# Altium PCB AICat V1.4 双面板 板厚1.6mm.PcbDoc (part 3 of 4)
Units mm, origin at the board's own origin, x right, y up, seen from the top; angles counter-clockwise.
Board outline 152.4 x 101.6 mm, 2 copper layers (Top Layer, Bottom Layer); 106 components, 84 nets, 315 pads, 240 vias.
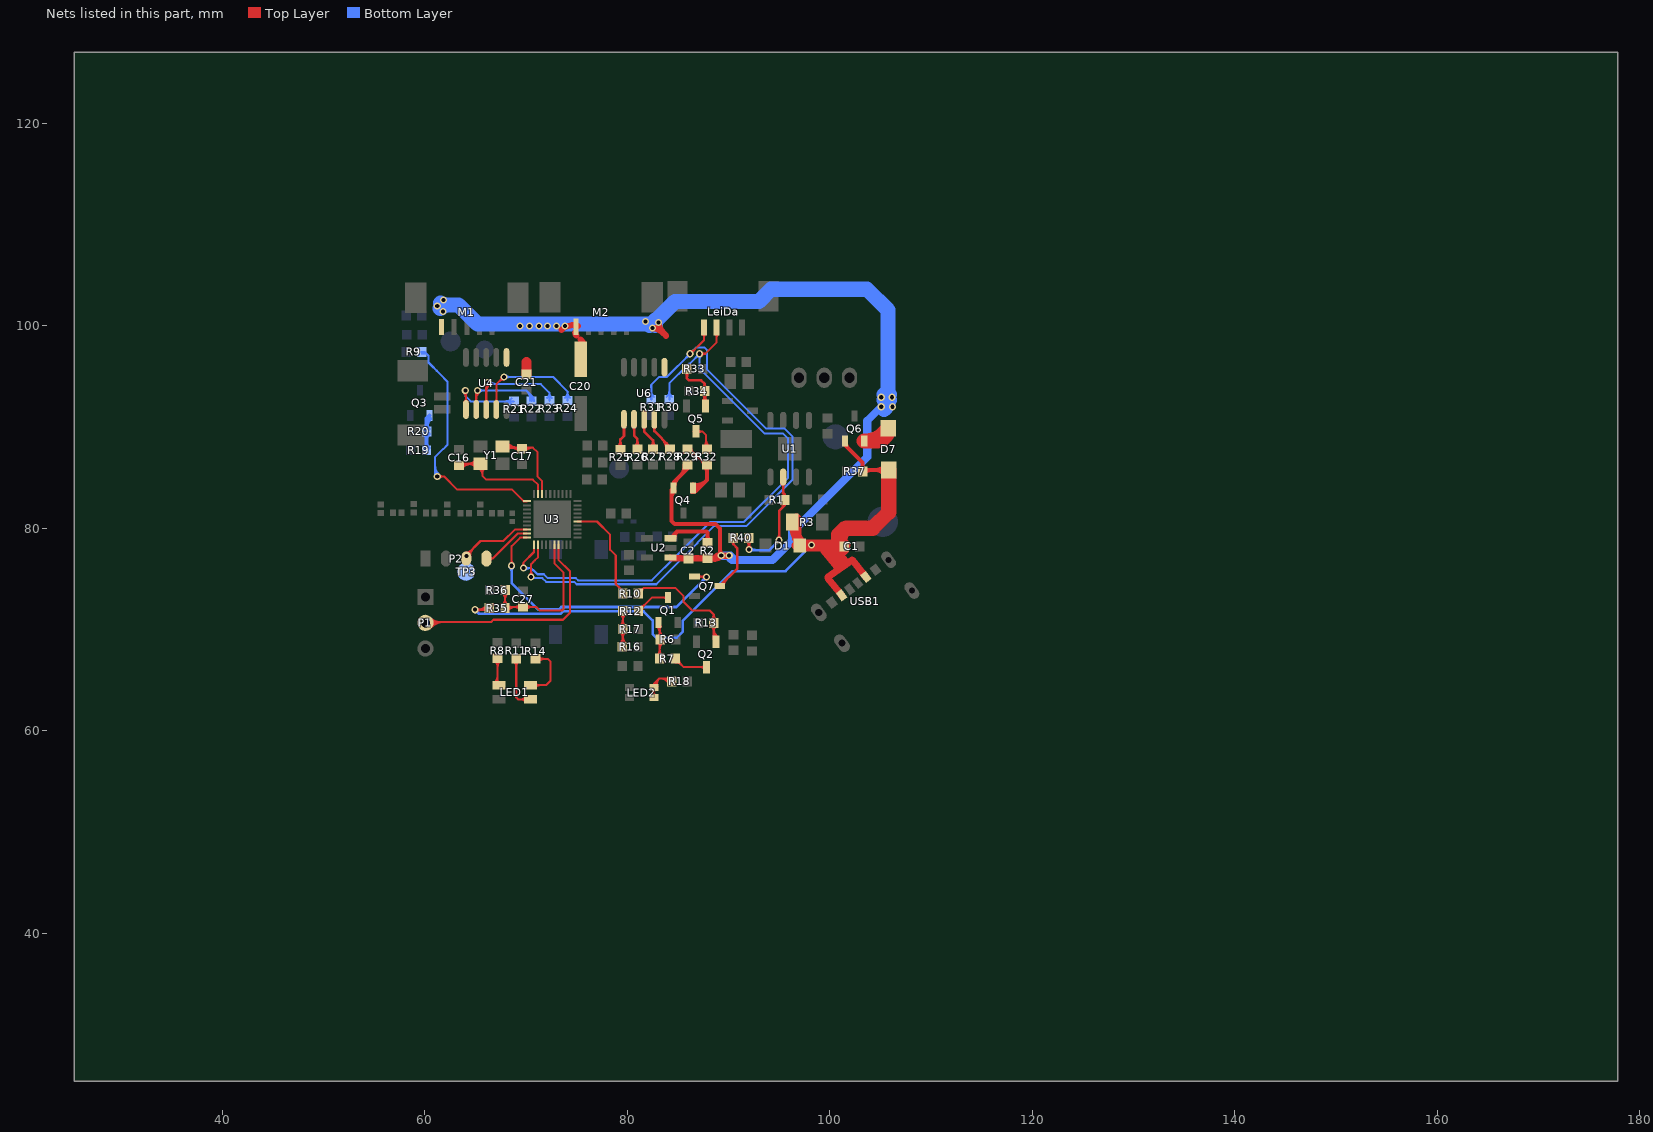
[diagram p3: the nets of this part, all layers, seen from the top]

## Via types
v1: diameter 0.7, hole 0.4, Top Layer to Bottom Layer, tented both sides, 240 vias

## Nets (pads, with @x,y where several pads share a name; then routed paths per layer and width w, separated by ;. In a path a pad name is that pad's centre, name@x,y a point inside that pad or via, vN(x,y) a via of type N, cw(c..) or ccw(c..) an arc to the next point about the centre after c; other vN are vias at no path point) (continued)
NetLED1_2: LED1.2 R8.1 | length 11.9
  Top Layer w0.203: R8.1@67.208,67.15 67.208,64.631 LED1.2@67.335,64.505 ; LED1.2@66.877,64.723 ccw(c66.075,65.524) 67.208,65.524 ; LED1.2@66.877,64.723 ccw(c66.075,65.524) 67.208,65.524 ; LED1.2@66.877,64.723 ccw(c66.075,65.524) 67.208,65.524 ; R8.1@66.951,66.893 cw(c66.331,66.272) 67.208,66.272 ; R8.1@66.951,66.893 cw(c66.331,66.272) 67.208,66.272 ; R8.1@66.951,66.893 cw(c66.331,66.272) 67.208,66.272 ; LED1.2@67.02,64.579 ccw(c66.566,65.033) 67.208,65.033 ; LED1.2@67.02,64.579 ccw(c66.566,65.033) 67.208,65.033 ; LED1.2@67.02,64.579 ccw(c66.566,65.033) 67.208,65.033 ; 67.208,64.975 ccw(c67.565,64.975) LED1.2@67.313,64.723 ; 67.208,64.975 ccw(c67.565,64.975) LED1.2@67.313,64.723 ; 67.208,64.975 ccw(c67.565,64.975) LED1.2@67.313,64.723 ; 67.208,66.272 cw(c68.086,66.272) R8.1@67.465,66.893 ; 67.208,66.272 cw(c68.086,66.272) R8.1@67.465,66.893 ; 67.208,66.272 cw(c68.086,66.272) R8.1@67.465,66.893
NetLED1_3: LED1.3 R11.1 | length 13
  Top Layer w0.203: R11.1@69.037,67.124 69.037,63.297 69.24,63.094 70.424,63.094 LED1.3@70.435,63.105 ; R11.1@68.78,66.867 cw(c68.16,66.247) 69.037,66.247 ; R11.1@68.78,66.867 cw(c68.16,66.247) 69.037,66.247 ; R11.1@68.78,66.867 cw(c68.16,66.247) 69.037,66.247 ; 69.037,66.247 cw(c69.915,66.247) R11.1@69.294,66.867 ; 69.037,66.247 cw(c69.915,66.247) R11.1@69.294,66.867 ; 69.037,66.247 cw(c69.915,66.247) R11.1@69.294,66.867 ; 69.423,63.094 ccw(c69.423,63.876) LED1.3@69.977,63.323 ; 69.423,63.094 ccw(c69.423,63.876) LED1.3@69.977,63.323 ; 69.423,63.094 ccw(c69.423,63.876) LED1.3@69.977,63.323 ; 69.477,63.094 cw(c69.477,62.387) LED1.3@69.977,62.887 ; 69.477,63.094 cw(c69.477,62.387) LED1.3@69.977,62.887 ; 69.477,63.094 cw(c69.477,62.387) LED1.3@69.977,62.887
NetLED1_4: LED1.4 R14.1 | length 13.3
  Top Layer w0.203: LED1.4@70.435,64.505 71.972,64.505 72.441,64.973 72.441,66.827 72.161,67.107 70.95,67.107 R14.1@70.942,67.099 ; LED1.4@70.893,64.287 cw(c71.419,63.76) 71.419,64.505 ; LED1.4@70.893,64.287 cw(c71.419,63.76) 71.419,64.505 ; LED1.4@70.893,64.287 cw(c71.419,63.76) 71.419,64.505 ; LED1.4@70.893,64.723 ccw(c71.419,65.249) 71.419,64.505 ; LED1.4@70.893,64.723 ccw(c71.419,65.249) 71.419,64.505 ; LED1.4@70.893,64.723 ccw(c71.419,65.249) 71.419,64.505 ; R14.1@71.224,66.842 cw(c71.864,66.202) 71.864,67.107 ; R14.1@71.224,66.842 cw(c71.864,66.202) 71.864,67.107 ; R14.1@71.224,66.842 cw(c71.864,66.202) 71.864,67.107 ; R14.1@71.224,67.356 ccw(c71.825,67.957) 71.825,67.107 ; R14.1@71.224,67.356 ccw(c71.825,67.957) 71.825,67.107 ; R14.1@71.224,67.356 ccw(c71.825,67.957) 71.825,67.107
NetLED2_2: LED2.2 LED2.4 R18.2 | length 21.6
  Top Layer w0.203: LED2.4@82.632,63.279 LED2.2@82.632,64.279 82.632,64.649 ; R18.2@84.396,64.872 84.091,65.176 83.16,65.176 ; LED2.4@82.457,63.455 ccw(c82.033,63.879) 82.632,63.879 ; LED2.4@82.457,63.455 ccw(c82.033,63.879) 82.632,63.879 ; LED2.4@82.457,63.455 ccw(c82.033,63.879) 82.632,63.879 ; LED2.2@82.457,64.104 cw(c82.033,63.68) 82.632,63.68 ; LED2.2@82.457,64.104 cw(c82.033,63.68) 82.632,63.68 ; LED2.2@82.457,64.104 cw(c82.033,63.68) 82.632,63.68 ; LED2.2@82.538,64.509 ccw(c82.481,64.649) 82.632,64.649 ; LED2.2@82.538,64.509 ccw(c82.481,64.649) 82.632,64.649 ; LED2.2@82.538,64.509 ccw(c82.481,64.649) 82.632,64.649 ; LED2.2@82.583,64.229 cw(c83.03,64.379) 82.696,64.713 ; LED2.2@82.583,64.229 cw(c83.03,64.379) 82.696,64.713 ; LED2.2@82.583,64.229 cw(c83.03,64.379) 82.696,64.713 ; 82.632,63.68 cw(c83.232,63.68) LED2.2@82.808,64.104 ; 82.632,63.68 cw(c83.232,63.68) LED2.2@82.808,64.104 ; 82.632,63.68 cw(c83.232,63.68) LED2.2@82.808,64.104 ; 82.632,63.879 ccw(c83.232,63.879) LED2.4@82.808,63.455 ; 82.632,63.879 ccw(c83.232,63.879) LED2.4@82.808,63.455 ; 82.632,63.879 ccw(c83.232,63.879) LED2.4@82.808,63.455 ; 82.632,64.649 ccw(c82.783,64.649) LED2.2@82.726,64.509 ; 82.632,64.649 ccw(c82.783,64.649) LED2.2@82.726,64.509 ; 82.632,64.649 ccw(c82.783,64.649) LED2.2@82.726,64.509 ; 82.632,64.649 83.16,65.176 ; LED2.2@82.775,64.294 cw(c83.376,64.496) 82.928,64.945 ; LED2.2@82.775,64.294 cw(c83.376,64.496) 82.928,64.945 ; LED2.2@82.775,64.294 cw(c83.376,64.496) 82.928,64.945 ; LED2.2@82.968,64.359 cw(c83.723,64.613) 83.16,65.176 ; LED2.2@82.968,64.359 cw(c83.723,64.613) 83.16,65.176 ; LED2.2@82.968,64.359 cw(c83.723,64.613) 83.16,65.176 ; 83.16,65.176 cw(c83.16,64.03) 84.099,64.688 ccw(c83.16,64.03) 83.16,65.176 ; 83.55,65.176 cw(c83.55,64.304) 84.265,64.805 ccw(c83.55,64.304) 83.55,65.176 ; R18.2@83.941,65.176 cw(c83.941,64.577) 84.431,64.921 ccw(c83.941,64.577) R18.2@83.941,65.176
NetQ1_1: Q1.1 R6.2 R7.1 | length 20.8
  Top Layer w0.203: Q1.1@83.047,70.305 cw(c82.671,69.929) 83.202,69.929 ; Q1.1@83.187,70.68 83.202,70.665 83.202,69.088 R6.2@83.253,69.037 83.202,68.986 R7.1@83.202,67.132 ; 83.202,70.004 cw(c83.629,70.004) Q1.1@83.327,70.305 ; R7.1@82.945,67.414 ccw(c82.325,68.035) 83.202,68.035 ; R7.1@82.945,67.414 ccw(c82.325,68.035) 83.202,68.035 ; R7.1@82.945,67.414 ccw(c82.325,68.035) 83.202,68.035 ; R6.2@82.996,68.755 cw(c82.498,68.257) 83.202,68.257 ; R6.2@82.996,68.755 cw(c82.498,68.257) 83.202,68.257 ; R6.2@82.996,68.755 cw(c82.498,68.257) 83.202,68.257 ; R6.2@82.996,69.319 ccw(c82.498,69.817) 83.202,69.817 ; R6.2@82.996,69.319 ccw(c82.498,69.817) 83.202,69.817 ; R6.2@82.996,69.319 ccw(c82.498,69.817) 83.202,69.817 ; 83.202,68.012 cw(c84.253,68.012) R6.2@83.51,68.755 ; 83.202,68.012 cw(c84.253,68.012) R6.2@83.51,68.755 ; 83.202,68.012 cw(c84.253,68.012) R6.2@83.51,68.755 ; 83.202,68.035 ccw(c84.08,68.035) R7.1@83.459,67.414 ; 83.202,68.035 ccw(c84.08,68.035) R7.1@83.459,67.414 ; 83.202,68.035 ccw(c84.08,68.035) R7.1@83.459,67.414 ; 83.202,68.503 cw(c83.762,68.503) R6.2@83.366,68.899 ; 83.202,68.503 cw(c83.762,68.503) R6.2@83.366,68.899 ; 83.202,68.503 cw(c83.762,68.503) R6.2@83.366,68.899 ; 83.202,69.571 ccw(c83.762,69.571) R6.2@83.366,69.175 ; 83.202,69.571 ccw(c83.762,69.571) R6.2@83.366,69.175 ; 83.202,69.571 ccw(c83.762,69.571) R6.2@83.366,69.175 ; 83.202,70.062 ccw(c84.253,70.062) R6.2@83.51,69.319 ; 83.202,70.062 ccw(c84.253,70.062) R6.2@83.51,69.319 ; 83.202,70.062 ccw(c84.253,70.062) R6.2@83.51,69.319 ; Q1.1@82.945,70.305 cw(c82.324,69.684) 83.202,69.684 ccw(c82.324,69.684) Q1.1@82.945,70.305
NetQ1_3: Q1.3 R12.1 | length 16.5
  Top Layer w0.203: R12.1@81.11,71.831 81.614,72.335 ; 81.82,72.541 81.614,72.335 ; Q1.3@84.137,73.15 Q1.3@84.035,73.15 82.429,73.15 81.614,72.335 ; R12.1@81.11,72.22 ccw(c81.11,73.157) 81.773,72.494 ; R12.1@81.11,72.22 ccw(c81.11,73.157) 81.773,72.494 ; R12.1@81.11,72.22 ccw(c81.11,73.157) 81.773,72.494 ; R12.1@81.11,72.22 ccw(c81.11,73.157) 81.773,72.494 ; R12.1@81.189,72.211 ccw(c81.288,72.661) 81.614,72.335 ; R12.1@81.189,72.211 ccw(c81.288,72.661) 81.614,72.335 ; R12.1@81.189,72.211 ccw(c81.288,72.661) 81.614,72.335 ; R12.1@81.189,72.211 ccw(c81.288,72.661) 81.614,72.335 ; R12.1@81.189,72.211 ccw(c81.288,72.661) 81.614,72.335 ; R12.1@81.189,72.211 ccw(c81.288,72.661) 81.614,72.335 ; R12.1@81.47,71.906 cw(c81.973,71.976) 81.614,72.335 ; R12.1@81.47,71.906 cw(c81.973,71.976) 81.614,72.335 ; R12.1@81.47,71.906 cw(c81.973,71.976) 81.614,72.335 ; R12.1@81.47,71.906 cw(c81.973,71.976) 81.614,72.335 ; R12.1@81.47,71.906 cw(c81.973,71.976) 81.614,72.335 ; R12.1@81.47,71.906 cw(c81.973,71.976) 81.614,72.335 ; R12.1@81.474,71.856 cw(c82.291,71.856) 81.713,72.434 ; R12.1@81.474,71.856 cw(c82.291,71.856) 81.713,72.434 ; R12.1@81.474,71.856 cw(c82.291,71.856) 81.713,72.434 ; R12.1@81.474,71.856 cw(c82.291,71.856) 81.713,72.434 ; 83.556,73.15 ccw(c83.556,73.629) 83.895,73.291 cw(c83.556,73.629) 83.556,73.15 ; 83.556,73.15 cw(c83.556,72.671) 83.895,73.01 ccw(c83.556,72.671) 83.556,73.15
NetQ2_1: Q2.1 R10.1 R13.2 | length 27.2
  Top Layer w0.203: R10.1@81.085,73.558 81.644,74.117 ; R13.2@88.295,70.945 ccw(c87.737,71.504) 88.527,71.504 88.149,71.882 ; R13.2@88.527,70.663 88.527,69.019 Q2.1@88.758,68.789 ; R13.2@88.552,70.663 88.552,71.478 ; 81.644,74.117 ccw(c82.119,73.642) 81.448,73.604 cw(c82.119,73.642) 81.644,74.117 ; 81.644,74.117 cw(c81.212,74.549) 81.132,73.944 ccw(c81.212,74.549) 81.644,74.117 ; 81.644,74.117 84.734,74.117 85.573,73.279 85.573,72.72 86.411,71.882 87.046,71.882 88.149,71.882 ; 88.149,71.882 88.552,71.478 ; R13.2@88.295,70.381 cw(c87.737,69.822) 88.527,69.822 ; R13.2@88.295,70.381 cw(c87.737,69.822) 88.527,69.822 ; R13.2@88.295,70.381 cw(c87.737,69.822) 88.527,69.822 ; 88.527,69.699 cw(c89.491,69.699) R13.2@88.809,70.381 ; 88.527,69.699 cw(c89.491,69.699) R13.2@88.809,70.381 ; 88.527,69.699 cw(c89.491,69.699) R13.2@88.809,70.381 ; 88.527,69.73 ccw(c89.424,69.73) Q2.1@88.79,69.096 ; 88.527,69.73 ccw(c89.424,69.73) Q2.1@88.79,69.096 ; 88.527,69.73 ccw(c89.424,69.73) Q2.1@88.79,69.096 ; R13.2@88.527,70.221 ccw(c89.915,70.221) Q2.1@88.933,69.239 ; R13.2@88.527,70.221 ccw(c89.915,70.221) Q2.1@88.933,69.239 ; R13.2@88.527,70.221 ccw(c89.915,70.221) Q2.1@88.933,69.239 ; 88.552,71.478 ccw(c89.23,71.478) 88.789,70.964 cw(c89.23,71.478) 88.552,71.478 ; 88.552,71.478 cw(c87.875,71.478) 88.316,70.964 ccw(c87.875,71.478) 88.552,71.478
NetQ2_3: Q2.3 R7.2 | length 9.2
  Top Layer w0.203: R7.2@84.889,67.279 R7.2@84.742,67.132 85.586,66.289 Q2.3@87.808,66.289 ; 87.208,66.289 cw(c87.208,65.689) Q2.3@87.632,66.113 ; 87.208,66.289 ccw(c87.208,66.888) Q2.3@87.632,66.464 ; 87.208,66.289 ccw(c87.208,66.888) Q2.3@87.632,66.464 ; 87.208,66.289 cw(c87.208,65.689) Q2.3@87.632,66.113 ; 87.208,66.289 ccw(c87.208,66.888) Q2.3@87.632,66.464 ; 87.208,66.289 cw(c87.208,65.689) Q2.3@87.632,66.113 ; R7.2@84.742,66.744 cw(c84.742,65.806) 85.405,66.469 ccw(c84.742,65.806) R7.2@84.742,66.744 ; R7.2@85.106,67.107 ccw(c85.923,67.107) 85.345,66.53 cw(c85.923,67.107) R7.2@85.106,67.107
NetQ3_1: Q3.1 R19.1 R20.2 | length 15.9
  Bottom Layer w0.381: R19.1@60.181,87.706 60.181,90.858 Q3.1@60.475,91.153 ; R19.1@59.986,87.925 ccw(c59.518,88.394) 60.181,88.394 ; R19.1@59.986,87.925 ccw(c59.518,88.394) 60.181,88.394 ; R19.1@59.986,87.925 ccw(c59.518,88.394) 60.181,88.394 ; R20.2@60.012,89.341 cw(c59.605,88.934) 60.181,88.934 ; R20.2@60.012,89.341 cw(c59.605,88.934) 60.181,88.934 ; R20.2@60.012,89.341 cw(c59.605,88.934) 60.181,88.934 ; R20.2@60.012,89.779 ccw(c59.605,90.187) 60.181,90.187 ; R20.2@60.012,89.779 ccw(c59.605,90.187) 60.181,90.187 ; R20.2@60.012,89.779 ccw(c59.605,90.187) 60.181,90.187 ; 60.181,88.394 ccw(c60.843,88.394) R19.1@60.375,87.925 ; 60.181,88.394 ccw(c60.843,88.394) R19.1@60.375,87.925 ; 60.181,88.394 ccw(c60.843,88.394) R19.1@60.375,87.925 ; 60.181,88.811 cw(c60.93,88.811) R20.2@60.4,89.341 ; 60.181,88.811 cw(c60.93,88.811) R20.2@60.4,89.341 ; 60.181,88.811 cw(c60.93,88.811) R20.2@60.4,89.341 ; R20.2@60.181,89.942 cw(c61.452,89.942) Q3.1@60.553,90.84 ; R20.2@60.181,89.942 cw(c61.452,89.942) Q3.1@60.553,90.84 ; R20.2@60.181,89.942 cw(c61.452,89.942) Q3.1@60.553,90.84 ; 60.181,90.31 ccw(c60.93,90.31) R20.2@60.4,89.779 ; 60.181,90.31 ccw(c60.93,90.31) R20.2@60.4,89.779 ; 60.181,90.31 ccw(c60.93,90.31) R20.2@60.4,89.779
NetQ4_1: Q4.1 R29.2 R32.1 | length 29.5
  Top Layer w0.203: R29.2@85.801,87.841 86.141,87.841 R32.1@87.706,86.276 ; R29.2@85.979,87.452 cw(c85.979,86.122) 86.919,87.063 ; R29.2@85.979,87.452 cw(c85.979,86.122) 86.919,87.063 ; R29.2@85.979,87.452 cw(c85.979,86.122) 86.919,87.063 ; R29.2@85.979,87.656 cw(c85.979,86.816) 86.572,87.41 ; R29.2@85.979,87.656 cw(c85.979,86.816) 86.572,87.41 ; R29.2@85.979,87.656 cw(c85.979,86.816) 86.572,87.41 ; R29.2@86.342,87.816 ccw(c86.766,87.816) 86.466,87.516 ; R29.2@86.342,87.816 ccw(c86.766,87.816) 86.466,87.516 ; R29.2@86.342,87.816 ccw(c86.766,87.816) 86.466,87.516 ; 86.996,86.986 ccw(c87.834,87.824) R32.1@87.834,86.639 ; 86.996,86.986 ccw(c87.834,87.824) R32.1@87.834,86.639 ; 86.996,86.986 ccw(c87.834,87.824) R32.1@87.834,86.639 ; 87.303,86.679 cw(c86.9,86.276) R32.1@87.47,86.276 ; 87.303,86.679 cw(c86.9,86.276) R32.1@87.47,86.276 ; 87.303,86.679 cw(c86.9,86.276) R32.1@87.47,86.276 ; 87.343,86.639 ccw(c87.834,87.13) R32.1@87.834,86.436 ; 87.343,86.639 ccw(c87.834,87.13) R32.1@87.834,86.436 ; 87.343,86.639 ccw(c87.834,87.13) R32.1@87.834,86.436
  Top Layer w0.381: Q4.1@86.485,83.74 ccw(c86.485,84.634) 87.116,84.002 ; Q4.1@86.485,83.777 86.891,83.777 87.859,84.744 ; Q4.1@86.485,84.121 ccw(c86.485,85.934) 87.767,84.652 ; R32.1@87.859,86.276 87.859,84.744 ; R32.1@87.664,86.082 cw(c87.196,85.613) 87.859,85.613 ; R32.1@87.664,86.082 cw(c87.196,85.613) 87.859,85.613 ; R32.1@87.664,86.082 cw(c87.196,85.613) 87.859,85.613 ; 87.859,84.744 cw(c86.781,85.822) 86.505,84.323 ccw(c86.781,85.822) 87.859,84.744 ; 87.859,85.613 cw(c88.521,85.613) R32.1@88.053,86.082 ; 87.859,85.613 cw(c88.521,85.613) R32.1@88.053,86.082 ; 87.859,85.613 cw(c88.521,85.613) R32.1@88.053,86.082 ; Q4.1@86.367,83.573 ccw(c86.462,84.09) 86.833,83.718 cw(c86.462,84.09) Q4.1@86.367,83.573 ; Q4.1@86.436,83.948 ccw(c86.621,84.956) 87.346,84.231 cw(c86.621,84.956) Q4.1@86.436,83.948 ; Q4.1@86.562,83.668 cw(c86.826,83.404) 86.826,83.777 ccw(c86.826,83.404) Q4.1@86.562,83.668
NetQ5_1: Q5.1 R33.1 R34.2 | length 18.4
  Top Layer w0.203: R33.1@85.768,95.733 R33.1@85.768,95.936 ; Q5.1@87.46,92.667 Q5.1@87.691,92.436
  Top Layer w0.254: R33.1@85.895,95.733 85.895,94.801 86.081,94.615 87.3,94.615 87.638,94.277 ; Q5.1@87.638,92.08 87.638,94.277 ; R33.1@85.656,95.469 cw(c85.079,94.892) 85.895,94.892 ; R33.1@85.656,95.469 cw(c85.079,94.892) 85.895,94.892 ; R33.1@85.656,95.469 cw(c85.079,94.892) 85.895,94.892 ; 85.895,94.892 cw(c86.711,94.892) R33.1@86.134,95.469 ; 85.895,94.892 cw(c86.711,94.892) R33.1@86.134,95.469 ; 85.895,94.892 cw(c86.711,94.892) R33.1@86.134,95.469 ; R34.2@87.399,93.284 cw(c86.822,92.707) 87.638,92.707 ; R34.2@87.399,93.284 cw(c86.822,92.707) 87.638,92.707 ; R34.2@87.399,93.284 cw(c86.822,92.707) 87.638,92.707 ; R34.2@87.427,93.837 ccw(c87.075,94.277) 87.638,94.277 ; R34.2@87.427,93.837 ccw(c87.075,94.277) 87.638,94.277 ; R34.2@87.427,93.837 ccw(c87.075,94.277) 87.638,94.277 ; 87.638,92.707 cw(c88.454,92.707) R34.2@87.877,93.284 ; 87.638,92.707 cw(c88.454,92.707) R34.2@87.877,93.284 ; 87.638,92.707 cw(c88.454,92.707) R34.2@87.877,93.284 ; R34.2@87.638,93.144 ccw(c88.531,93.144) Q5.1@87.899,92.513 ; R34.2@87.638,93.144 ccw(c88.531,93.144) Q5.1@87.899,92.513 ; R34.2@87.638,93.144 ccw(c88.531,93.144) Q5.1@87.899,92.513 ; 87.638,94.277 ccw(c88.201,94.277) R34.2@87.849,93.837 ; 87.638,94.277 ccw(c88.201,94.277) R34.2@87.849,93.837 ; 87.638,94.277 ccw(c88.201,94.277) R34.2@87.849,93.837
NetQ5_3: Q5.3 R32.2 | length 10.2
  Top Layer w0.203: Q5.3@86.563,89.535 87.452,89.535 ; R32.2@87.706,87.816 87.757,87.867 87.757,89.23 87.452,89.535 ; 87.452,89.535 cw(c87.452,90.176) 86.976,89.747 ccw(c87.452,90.176) 87.452,89.535 ; R32.2@87.577,88.073 ccw(c87.141,88.508) 87.757,88.508 ; R32.2@87.577,88.073 ccw(c87.141,88.508) 87.757,88.508 ; R32.2@87.577,88.073 ccw(c87.141,88.508) 87.757,88.508 ; 87.757,88.388 ccw(c88.405,88.388) R32.2@87.947,87.929 ; 87.757,88.388 ccw(c88.405,88.388) R32.2@87.947,87.929 ; 87.757,88.388 ccw(c88.405,88.388) R32.2@87.947,87.929 ; 87.757,88.878 ccw(c88.896,88.878) R32.2@88.091,88.073 ; 87.757,88.878 ccw(c88.896,88.878) R32.2@88.091,88.073 ; 87.757,88.878 ccw(c88.896,88.878) R32.2@88.091,88.073 ; Q5.3@86.967,89.405 cw(c87.282,89.09) 87.282,89.535 ccw(c87.282,89.09) Q5.3@86.967,89.405
NetQ7_3: Q7.3 R40.1 | length 7.8
  Top Layer w0.254: Q7.3@89.127,74.283 90.881,76.037 90.881,78.021 90.467,78.435 ; Q7.3@89.535,74.283 cw(c90.52,74.283) 89.823,74.979 ; R40.1@90.467,79.045 90.467,78.435 ; 90.467,78.435 ccw(c90.13,78.435) 90.298,78.727 cw(c90.13,78.435) 90.467,78.435 ; 90.467,78.435 cw(c90.803,78.435) 90.635,78.727 ccw(c90.803,78.435) 90.467,78.435
NetR1_2: R1.2 R40.2 U1.2 | length 23.6
  Top Layer w0.254: R40.2@91.737,78.773 92.024,78.486 ; R40.2@91.768,78.781 cw(c91.149,78.162) v1@92.024,78.162 ; v1@91.867,78.059 ccw(c91.486,78.44) 92.024,78.44 ccw(c92.563,78.44) v1@92.182,78.059 ; R40.2@91.876,78.708 cw(c91.783,78.486) 92.024,78.486 ; v1(92.024,77.902) 92.024,78.486 ; v1@92.024,78.246 cw(c92.781,78.246) R40.2@92.246,78.781 ; R40.2@92.166,78.721 ccw(c92.291,78.486) 92.024,78.486 ; v1@94.838,78.974 ccw(c94.458,79.355) 94.996,79.355 ccw(c95.534,79.355) v1@95.154,78.974 ; v1(94.996,78.816) 94.996,81.712 95.537,82.253 ; 95.259,81.975 ccw(c94.955,82.279) R1.2@95.281,82.559 ; R1.2@95.397,82.472 cw(c95.298,82.253) 95.537,82.253 ; U1.2@95.402,85.649 U1.2@95.402,85.065 95.402,83.49 95.529,83.363 ; 95.453,82.168 ccw(c95.163,82.458) R1.2@95.474,82.724 ; R1.2@95.537,82.804 95.537,82.253 ; R1.2@95.678,82.472 ccw(c95.777,82.253) 95.537,82.253 ; U1.2@95.277,84.394 cw(c94.973,84.09) 95.402,84.09 ; U1.2@95.277,84.394 cw(c94.973,84.09) 95.402,84.09 ; U1.2@95.277,84.394 cw(c94.973,84.09) 95.402,84.09 ; 95.376,83.516 cw(c94.995,83.135) R1.2@95.464,82.87 ; 95.376,83.516 cw(c94.995,83.135) R1.2@95.464,82.87 ; 95.376,83.516 cw(c94.995,83.135) R1.2@95.464,82.87 ; 95.402,84.09 cw(c95.832,84.09) U1.2@95.528,84.394 ; 95.402,84.09 cw(c95.832,84.09) U1.2@95.528,84.394 ; 95.402,84.09 cw(c95.832,84.09) U1.2@95.528,84.394 ; 95.458,83.435 cw(c95.174,83.151) R1.2@95.474,82.885 ; 95.458,83.435 cw(c95.174,83.151) R1.2@95.474,82.885 ; 95.458,83.435 cw(c95.174,83.151) R1.2@95.474,82.885
  Bottom Layer w0.254: v1@92.182,77.744 cw(c92.44,77.486) 92.44,77.851 ; v1@92.182,78.059 ccw(c92.685,78.563) 92.685,77.851 ; v1@92.329,77.851 94.031,77.851 v1(94.996,78.816) ; v1@94.773,78.816 cw(c94.235,78.816) 94.615,78.436 cw(c94.996,78.055) v1@94.996,78.593
NetR2_2: R2.2 U2.3 | length 10.3
  Top Layer w0.381: U2.3@84.256,79.013 84.923,79.68 ; R2.2@87.935,78.57 87.935,79.578 87.833,79.68 84.923,79.68 ; U2.3@84.666,79.017 cw(c85.548,79.055) 84.923,79.68 ; U2.3@84.666,79.017 cw(c85.548,79.055) 84.923,79.68 ; U2.3@84.666,79.017 cw(c85.548,79.055) 84.923,79.68 ; R2.2@87.741,78.764 ccw(c87.272,79.233) 87.935,79.233 ; R2.2@87.741,78.764 ccw(c87.272,79.233) 87.935,79.233 ; R2.2@87.741,78.764 ccw(c87.272,79.233) 87.935,79.233 ; 87.935,79.233 ccw(c88.598,79.233) R2.2@88.129,78.764 ; 87.935,79.233 ccw(c88.598,79.233) R2.2@88.129,78.764 ; 87.935,79.233 ccw(c88.598,79.233) R2.2@88.129,78.764
NetR12_2: R12.2 R16.2 R17.1 | length 21.4
  Top Layer w0.203: R16.2@79.364,68.583 ccw(c78.866,69.08) 79.57,69.08 ; R12.2@79.57,71.831 79.57,68.351 R16.2@79.621,68.301 ; R16.2@79.734,68.439 cw(c80.13,68.835) 79.57,68.835 ; R16.2@79.878,68.583 cw(c80.621,69.326) 79.57,69.326 ; R17.1@79.288,69.771 cw(c78.606,69.09) 79.57,69.09 ; R17.1@79.288,69.771 cw(c78.606,69.09) 79.57,69.09 ; R17.1@79.288,69.771 cw(c78.606,69.09) 79.57,69.09 ; R17.1@79.288,70.335 ccw(c78.606,71.017) 79.57,71.017 ; R17.1@79.288,70.335 ccw(c78.606,71.017) 79.57,71.017 ; R17.1@79.288,70.335 ccw(c78.606,71.017) 79.57,71.017 ; R12.2@79.313,71.549 cw(c78.693,70.929) 79.57,70.929 ; R12.2@79.313,71.549 cw(c78.693,70.929) 79.57,70.929 ; R12.2@79.313,71.549 cw(c78.693,70.929) 79.57,70.929 ; 79.57,68.835 cw(c79.01,68.835) 79.406,68.439 ccw(c79.01,68.835) 79.57,68.835 ; 79.57,69.08 ccw(c80.274,69.08) 79.776,68.583 cw(c80.274,69.08) 79.57,69.08 ; 79.57,69.212 cw(c80.361,69.212) R17.1@79.802,69.771 ; 79.57,69.212 cw(c80.361,69.212) R17.1@79.802,69.771 ; 79.57,69.212 cw(c80.361,69.212) R17.1@79.802,69.771 ; 79.57,69.326 cw(c78.519,69.326) 79.262,68.583 ccw(c78.519,69.326) 79.57,69.326 ; 79.57,70.894 ccw(c80.361,70.894) R17.1@79.802,70.335 ; 79.57,70.894 ccw(c80.361,70.894) R17.1@79.802,70.335 ; 79.57,70.894 ccw(c80.361,70.894) R17.1@79.802,70.335 ; 79.57,70.929 cw(c80.447,70.929) R12.2@79.827,71.549 ; 79.57,70.929 cw(c80.447,70.929) R12.2@79.827,71.549 ; 79.57,70.929 cw(c80.447,70.929) R12.2@79.827,71.549
NetR21_1: R21.1 U4.1 | length 18.8
  Top Layer w0.203: v1(64.008,93.599) 64.077,93.53 U4.1@64.077,91.732 ; v1@63.832,93.423 cw(c63.242,92.833) 64.077,92.833 ; v1@63.832,93.423 cw(c63.242,92.833) 64.077,92.833 ; v1@63.832,93.423 cw(c63.242,92.833) 64.077,92.833 ; U4.1@63.951,92.506 ccw(c63.646,92.811) 64.077,92.811 ; U4.1@63.951,92.506 ccw(c63.646,92.811) 64.077,92.811 ; U4.1@63.951,92.506 ccw(c63.646,92.811) 64.077,92.811 ; 64.077,92.811 ccw(c64.508,92.811) U4.1@64.203,92.506 ; 64.077,92.811 ccw(c64.508,92.811) U4.1@64.203,92.506 ; 64.077,92.811 ccw(c64.508,92.811) U4.1@64.203,92.506 ; 64.077,93.166 cw(c64.441,93.166) v1@64.184,93.423 ; 64.077,93.166 cw(c64.441,93.166) v1@64.184,93.423 ; 64.077,93.166 cw(c64.441,93.166) v1@64.184,93.423
  Bottom Layer w0.203: v1(64.008,93.599) 64.008,93.066 ; R21.1@68.834,92.54 64.533,92.54 64.008,93.066 ; v1@63.848,93.409 cw(c63.56,93.066) 64.008,93.066 ; v1@63.848,93.409 cw(c63.56,93.066) 64.008,93.066 ; v1@63.848,93.409 cw(c63.56,93.066) 64.008,93.066 ; 64.008,93.066 cw(c64.456,93.066) v1@64.168,93.409 ; 64.008,93.066 cw(c64.456,93.066) v1@64.168,93.409 ; 64.008,93.066 cw(c64.456,93.066) v1@64.168,93.409 ; 67.932,92.54 cw(c67.932,91.663) R21.1@68.552,92.283 ; 67.932,92.54 ccw(c67.932,93.418) R21.1@68.552,92.797 ; 67.932,92.54 ccw(c67.932,93.418) R21.1@68.552,92.797 ; 67.932,92.54 cw(c67.932,91.663) R21.1@68.552,92.283 ; 67.932,92.54 ccw(c67.932,93.418) R21.1@68.552,92.797 ; 67.932,92.54 cw(c67.932,91.663) R21.1@68.552,92.283
NetR22_1: R22.1 U4.2 | length 24
  Top Layer w0.203: U4.2@65.077,91.732 65.077,93.474 v1(65.202,93.599) ; U4.2@64.951,92.506 ccw(c64.646,92.811) 65.077,92.811 ; U4.2@64.951,92.506 ccw(c64.646,92.811) 65.077,92.811 ; U4.2@64.951,92.506 ccw(c64.646,92.811) 65.077,92.811 ; 65.077,92.698 cw(c66.103,92.698) v1@65.377,93.423 ; 65.077,92.698 cw(c66.103,92.698) v1@65.377,93.423 ; 65.077,92.698 cw(c66.103,92.698) v1@65.377,93.423 ; 65.077,92.811 ccw(c65.508,92.811) U4.2@65.203,92.506 ; 65.077,92.811 ccw(c65.508,92.811) U4.2@65.203,92.506 ; 65.077,92.811 ccw(c65.508,92.811) U4.2@65.203,92.506 ; 65.077,93.189 cw(c65.612,93.189) v1@65.234,93.567 ; 65.077,93.189 cw(c65.612,93.189) v1@65.234,93.567 ; 65.077,93.189 cw(c65.612,93.189) v1@65.234,93.567
  Bottom Layer w0.203: v1(65.202,93.599) 70.053,93.599 70.561,93.091 R22.1@70.561,92.566 ; v1@65.377,93.423 cw(c65.801,92.999) 65.801,93.599 ; v1@65.377,93.423 cw(c65.801,92.999) 65.801,93.599 ; v1@65.377,93.423 cw(c65.801,92.999) 65.801,93.599 ; v1@65.377,93.775 ccw(c65.801,94.199) 65.801,93.599 ; v1@65.377,93.775 ccw(c65.801,94.199) 65.801,93.599 ; v1@65.377,93.775 ccw(c65.801,94.199) 65.801,93.599 ; 70.057,93.595 cw(c69.244,92.782) R22.1@70.378,92.592 ; 70.057,93.595 cw(c69.244,92.782) R22.1@70.378,92.592 ; 70.057,93.595 cw(c69.244,92.782) R22.1@70.378,92.592 ; 70.336,93.316 cw(c69.722,92.702) R22.1@70.579,92.558 ; 70.336,93.316 cw(c69.722,92.702) R22.1@70.579,92.558 ; 70.336,93.316 cw(c69.722,92.702) R22.1@70.579,92.558 ; 70.615,93.037 cw(c70.2,92.622) R22.1@70.779,92.525 ; 70.615,93.037 cw(c70.2,92.622) R22.1@70.779,92.525 ; 70.615,93.037 cw(c70.2,92.622) R22.1@70.779,92.525
NetR23_1: R23.1 U4.3 | length 23.5
  Top Layer w0.203: U4.3@66.077,91.732 66.077,94.246 v1(66.218,94.386) ; U4.3@65.951,92.506 ccw(c65.646,92.811) 66.077,92.811 ; U4.3@65.951,92.506 ccw(c65.646,92.811) 66.077,92.811 ; U4.3@65.951,92.506 ccw(c65.646,92.811) 66.077,92.811 ; 66.077,92.811 ccw(c66.508,92.811) U4.3@66.203,92.506 ; 66.077,92.811 ccw(c66.508,92.811) U4.3@66.203,92.506 ; 66.077,92.811 ccw(c66.508,92.811) U4.3@66.203,92.506 ; 66.077,93.447 cw(c67.157,93.447) v1@66.393,94.211 ; 66.077,93.447 cw(c67.157,93.447) v1@66.393,94.211 ; 66.077,93.447 cw(c67.157,93.447) v1@66.393,94.211 ; 66.077,93.937 cw(c66.667,93.937) v1@66.25,94.354 ; 66.077,93.937 cw(c66.667,93.937) v1@66.25,94.354 ; 66.077,93.937 cw(c66.667,93.937) v1@66.25,94.354
  Bottom Layer w0.203: v1@66.263,94.24 71.47,94.24 72.314,93.396 ; R23.1@72.314,92.591 72.314,93.396 ; v1@66.25,94.418 ccw(c66.681,94.85) 66.681,94.24 ; v1@66.25,94.418 ccw(c66.681,94.85) 66.681,94.24 ; v1@66.25,94.418 ccw(c66.681,94.85) 66.681,94.24 ; v1@66.393,94.562 ccw(c67.172,95.341) 67.172,94.24 ; v1@66.393,94.562 ccw(c67.172,95.341) 67.172,94.24 ; v1@66.393,94.562 ccw(c67.172,95.341) 67.172,94.24 ; R23.1@72.073,92.864 ccw(c71.604,93.396) 72.314,93.396 ; R23.1@72.073,92.864 ccw(c71.604,93.396) 72.314,93.396 ; R23.1@72.073,92.864 ccw(c71.604,93.396) 72.314,93.396 ; 72.314,93.396 ccw(c73.023,93.396) R23.1@72.554,92.864 ; 72.314,93.396 ccw(c73.023,93.396) R23.1@72.554,92.864 ; 72.314,93.396 ccw(c73.023,93.396) R23.1@72.554,92.864
NetR24_1: R24.1 U4.4 | length 22.6
  Top Layer w0.203: U4.4@67.077,91.732 67.077,94.204 v1(67.818,94.945) ; U4.4@66.951,92.506 ccw(c66.646,92.811) 67.077,92.811 ; U4.4@66.951,92.506 ccw(c66.646,92.811) 67.077,92.811 ; U4.4@66.951,92.506 ccw(c66.646,92.811) 67.077,92.811 ; 67.077,92.811 ccw(c67.508,92.811) U4.4@67.203,92.506 ; 67.077,92.811 ccw(c67.508,92.811) U4.4@67.203,92.506 ; 67.077,92.811 ccw(c67.508,92.811) U4.4@67.203,92.506 ; 67.394,94.521 cw(c67.818,94.097) v1@67.818,94.697 ; 67.394,94.521 ccw(c66.97,94.945) v1@67.57,94.945 ; 67.394,94.521 ccw(c66.97,94.945) v1@67.57,94.945 ; 67.394,94.521 cw(c67.818,94.097) v1@67.818,94.697 ; 67.394,94.521 ccw(c66.97,94.945) v1@67.57,94.945 ; 67.394,94.521 cw(c67.818,94.097) v1@67.818,94.697
  Bottom Layer w0.203: v1(67.818,94.945) 72.669,94.945 74.143,93.472 74.092,93.421 ; R24.1@74.092,92.616 74.092,93.421 ; v1@67.994,94.77 cw(c68.418,94.346) 68.418,94.945 ; v1@67.994,94.77 cw(c68.418,94.346) 68.418,94.945 ; v1@67.994,94.77 cw(c68.418,94.346) 68.418,94.945 ; v1@67.994,95.121 ccw(c68.418,95.545) 68.418,94.945 ; v1@67.994,95.121 ccw(c68.418,95.545) 68.418,94.945 ; v1@67.994,95.121 ccw(c68.418,95.545) 68.418,94.945 ; R24.1@73.851,92.889 ccw(c73.382,93.421) 74.092,93.421 ; R24.1@73.851,92.889 ccw(c73.382,93.421) 74.092,93.421 ; R24.1@73.851,92.889 ccw(c73.382,93.421) 74.092,93.421 ; 74.092,93.421 ccw(c74.801,93.421) R24.1@74.332,92.889 ; 74.092,93.421 ccw(c74.801,93.421) R24.1@74.332,92.889 ; 74.092,93.421 ccw(c74.801,93.421) R24.1@74.332,92.889
NetR25_1: R25.1 U6.1 | length 8.7
  Top Layer w0.254: R25.1@79.324,87.765 79.324,88.773 79.68,89.129 79.68,90.76 U6.1@79.673,90.767 ; R25.1@79.085,88.004 ccw(c78.508,88.581) 79.324,88.581 ; R25.1@79.085,88.004 ccw(c78.508,88.581) 79.324,88.581 ; R25.1@79.085,88.004 ccw(c78.508,88.581) 79.324,88.581 ; 79.324,88.581 ccw(c80.14,88.581) R25.1@79.563,88.004 ; 79.324,88.581 ccw(c80.14,88.581) R25.1@79.563,88.004 ; 79.324,88.581 ccw(c80.14,88.581) R25.1@79.563,88.004 ; U6.1@79.564,90.012 cw(c79.286,89.733) 79.68,89.733 ; U6.1@79.564,90.012 cw(c79.286,89.733) 79.68,89.733 ; U6.1@79.564,90.012 cw(c79.286,89.733) 79.68,89.733 ; 79.68,89.768 cw(c80.025,89.768) U6.1@79.781,90.012 ; 79.68,89.768 cw(c80.025,89.768) U6.1@79.781,90.012 ; 79.68,89.768 cw(c80.025,89.768) U6.1@79.781,90.012
NetR26_1: R26.1 U6.2 | length 8.7
  Top Layer w0.254: U6.2@80.673,90.767 80.673,89.152 81.001,88.824 81.001,87.816 R26.1@81.026,87.79 ; U6.2@80.564,90.012 cw(c80.303,89.75) 80.673,89.75 ; U6.2@80.564,90.012 cw(c80.303,89.75) 80.673,89.75 ; U6.2@80.564,90.012 cw(c80.303,89.75) 80.673,89.75 ; 80.673,89.75 cw(c81.042,89.75) U6.2@80.781,90.012 ; 80.673,89.75 cw(c81.042,89.75) U6.2@80.781,90.012 ; 80.673,89.75 cw(c81.042,89.75) U6.2@80.781,90.012 ; R26.1@80.762,88.029 ccw(c80.186,88.605) 81.001,88.605 ; R26.1@80.762,88.029 ccw(c80.186,88.605) 81.001,88.605 ; R26.1@80.762,88.029 ccw(c80.186,88.605) 81.001,88.605 ; 81.001,88.607 ccw(c81.818,88.607) R26.1@81.24,88.029 ; 81.001,88.607 ccw(c81.818,88.607) R26.1@81.24,88.029 ; 81.001,88.607 ccw(c81.818,88.607) R26.1@81.24,88.029
NetR27_1: R27.1 U6.3 | length 8.9
  Top Layer w0.254: U6.3@81.673,90.767 81.673,89.549 82.55,88.671 R27.1@82.55,87.816 ; U6.3@81.564,90.012 cw(c81.303,89.75) 81.673,89.75 ; U6.3@81.564,90.012 cw(c81.303,89.75) 81.673,89.75 ; U6.3@81.564,90.012 cw(c81.303,89.75) 81.673,89.75 ; 81.673,89.75 cw(c82.042,89.75) U6.3@81.781,90.012 ; 81.673,89.75 cw(c82.042,89.75) U6.3@81.781,90.012 ; 81.673,89.75 cw(c82.042,89.75) U6.3@81.781,90.012 ; R27.1@82.311,88.055 ccw(c81.734,88.632) 82.55,88.632 ; R27.1@82.311,88.055 ccw(c81.734,88.632) 82.55,88.632 ; R27.1@82.311,88.055 ccw(c81.734,88.632) 82.55,88.632 ; 82.55,88.632 ccw(c83.366,88.632) R27.1@82.789,88.055 ; 82.55,88.632 ccw(c83.366,88.632) R27.1@82.789,88.055 ; 82.55,88.632 ccw(c83.366,88.632) R27.1@82.789,88.055
NetR28_1: R28.1 U6.4 | length 10.6
  Top Layer w0.203: R28.1@83.97,87.835 R28.1@83.97,87.937
  Top Layer w0.254: U6.4@82.673,90.767 82.673,89.59 84.226,88.036 R28.1@84.226,87.816 ; U6.4@82.564,90.012 cw(c82.303,89.75) 82.673,89.75 ; U6.4@82.564,90.012 cw(c82.303,89.75) 82.673,89.75 ; U6.4@82.564,90.012 cw(c82.303,89.75) 82.673,89.75 ; 82.673,89.75 cw(c83.042,89.75) U6.4@82.781,90.012 ; 82.673,89.75 cw(c83.042,89.75) U6.4@82.781,90.012 ; 82.673,89.75 cw(c83.042,89.75) U6.4@82.781,90.012 ; 83.451,88.812 cw(c82.454,87.816) R28.1@83.863,87.816 ; 83.451,88.812 cw(c82.454,87.816) R28.1@83.863,87.816 ; 83.451,88.812 cw(c82.454,87.816) R28.1@83.863,87.816 ; 83.884,88.378 cw(c83.322,87.816) R28.1@84.117,87.816 ; 83.884,88.378 cw(c83.322,87.816) R28.1@84.117,87.816 ; 83.884,88.378 cw(c83.322,87.816) R28.1@84.117,87.816
NTC_CON: R9.2 U3.31 | length 32.8
  Top Layer w0.203: v1(61.239,85.115) 61.925,85.115 63.221,83.82 68.631,83.82 69.779,82.671 U3.31@70.098,82.671 ; v1@61.415,84.94 cw(c61.839,84.516) 61.839,85.115 ; v1@61.415,84.94 cw(c61.839,84.516) 61.839,85.115 ; v1@61.415,84.94 cw(c61.839,84.516) 61.839,85.115 ; v1@61.415,85.291 ccw(c61.839,85.715) 61.839,85.115 ; v1@61.415,85.291 ccw(c61.839,85.715) 61.839,85.115 ; v1@61.415,85.291 ccw(c61.839,85.715) 61.839,85.115
  Bottom Layer w0.203: R9.2@59.698,97.409 60.02,97.409 60.376,97.053 60.376,96.368 61.468,95.275 ; R9.2@59.752,97.233 cw(c59.938,96.72) 60.323,97.106 ; 61.189,95.555 61.468,95.275 ; v1(61.239,85.115) 61.036,85.319 61.036,87.046 61.798,87.808 61.824,87.808 62.255,88.24 62.255,94.488 61.468,95.275 ; 61.036,85.715 ccw(c61.839,85.715) v1@61.271,85.147 ; 61.036,85.715 ccw(c61.839,85.715) v1@61.271,85.147 ; 61.036,85.715 ccw(c61.839,85.715) v1@61.271,85.147 ; 61.036,86.206 ccw(c62.33,86.206) v1@61.415,85.291 ; 61.036,86.206 ccw(c62.33,86.206) v1@61.415,85.291 ; 61.036,86.206 ccw(c62.33,86.206) v1@61.415,85.291
RX_DEBUG: P2.3 TP3.1 U3.38 | length 15.2
  Top Layer w0.203: P2.3@64.096,77.013 64.096,77.33 65.507,78.74 67.767,78.74 68.899,79.871 U3.38@70.098,79.871 ; P2.3@64.096,77.611 ccw(c64.096,78.291) 64.577,77.81 ; P2.3@64.096,77.611 ccw(c64.096,78.291) 64.577,77.81 ; P2.3@64.096,77.611 ccw(c64.096,78.291) 64.577,77.81 ; P2.3@64.292,77.213 cw(c65.045,77.213) 64.512,77.746 ; P2.3@64.292,77.213 cw(c65.045,77.213) 64.512,77.746 ; P2.3@64.292,77.213 cw(c65.045,77.213) 64.512,77.746 ; P2.3@64.495,77.213 cw(c65.739,77.213) 64.859,78.093 ; P2.3@64.495,77.213 cw(c65.739,77.213) 64.859,78.093 ; P2.3@64.495,77.213 cw(c65.739,77.213) 64.859,78.093
  Bottom Layer w0.203: TP3.1@64.084,75.717 64.11,75.743 v1(64.11,77.267)
RX_LEIDA: LeiDa.4 R31.1 U3.2 | length 74.4
  Top Layer w0.203: v1(70.51,75.2) 70.51,76.454 70.884,76.827 ; 70.663,76.606 70.884,76.827 ; U3.2@71.197,78.372 71.197,77.141 70.884,76.827 ; v1(86.208,97.231) 86.233,97.231 87.583,98.582 LeiDa.4@87.583,99.821 ; v1@86.208,97.48 ccw(c86.208,98.141) 86.675,97.673 ; v1@86.456,97.231 cw(c86.994,97.231) 86.614,97.612 ; 70.51,75.8 ccw(c71.11,75.8) 70.686,75.376 cw(c71.11,75.8) 70.51,75.8 ; 70.51,75.8 cw(c69.911,75.8) 70.335,75.376 ccw(c69.911,75.8) 70.51,75.8 ; LeiDa.4@87.443,99.181 cw(c87.104,98.843) 87.583,98.843 ; LeiDa.4@87.443,99.181 cw(c87.104,98.843) 87.583,98.843 ; LeiDa.4@87.443,99.181 cw(c87.104,98.843) 87.583,98.843 ; 87.583,98.843 cw(c88.062,98.843) LeiDa.4@87.724,99.181 ; 87.583,98.843 cw(c88.062,98.843) LeiDa.4@87.724,99.181 ; 87.583,98.843 cw(c88.062,98.843) LeiDa.4@87.724,99.181
  Bottom Layer w0.203: v1(70.51,75.2) 70.628,75.082 71.607,75.082 71.988,74.701 74.766,74.701 74.994,74.473 82.88,74.473 86.919,78.511 86.919,78.56 88.597,80.239 91.782,80.239 96.311,84.768 96.311,89.077 95.548,89.84 93.719,89.84 87.89,95.669 87.89,97.587 87.616,97.861 86.837,97.861 v1(86.208,97.231) 83.922,94.945 83.16,94.945 82.372,94.158 R31.1@82.372,92.718 ; v1@85.959,97.231 cw(c85.36,97.231) 85.784,96.807 cw(c86.208,96.383) v1@86.208,96.983 ; v1@86.208,97.48 ccw(c86.208,98.079) 86.632,97.655 ccw(c87.056,97.231) v1@86.456,97.231 ; R31.1@82.115,92.975 ccw(c81.495,93.595) 82.372,93.595 ; R31.1@82.115,92.975 ccw(c81.495,93.595) 82.372,93.595 ; R31.1@82.115,92.975 ccw(c81.495,93.595) 82.372,93.595 ; 82.372,93.595 ccw(c83.25,93.595) R31.1@82.629,92.975 ; 82.372,93.595 ccw(c83.25,93.595) R31.1@82.629,92.975 ; 82.372,93.595 ccw(c83.25,93.595) R31.1@82.629,92.975
SET_CHARG_I: Q7.1 U3.40 | length 32.7
  Top Layer w0.203: v1@68.404,76.477 ccw(c67.98,76.901) 68.58,76.901 ccw(c69.18,76.901) v1@68.756,76.477 ; v1(68.58,76.302) 68.58,78.232 69.419,79.071 U3.40@70.098,79.071 ; Q7.1@86.657,75.233 87.81,75.233 v1(87.833,75.209) ; Q7.1@87.032,75.093 cw(c87.371,74.754) 87.371,75.233 cw(c87.371,75.712) Q7.1@87.032,75.373 ; Q7.1@87.177,75.233 cw(c87.177,74.553) v1@87.658,75.034 ; 87.29,75.233 ccw(c87.29,75.753) v1@87.658,75.385
  Bottom Layer w0.254: v1@68.422,76.144 cw(c68.042,75.763) 68.58,75.763 cw(c69.118,75.763) v1@68.738,76.144 ; v1(68.58,76.302) 68.58,74.6 71.2,71.98 73.24,71.98 73.488,72.228 84.852,72.228 v1(87.833,75.209) ; v1@87.61,75.209 cw(c87.072,75.209) 87.453,74.829 cw(c87.833,74.448) v1@87.833,74.986
SWS: P1.3 U3.7 | length 37.7
  Top Layer w0.203: P1.3@60.071,70.663 60.147,70.739 66.243,70.739 66.548,70.739 66.777,70.968 73.66,70.968 74.346,71.653 74.346,75.763 73.197,76.912 U3.7@73.197,78.372 ; P1.3@60.277,70.456 cw(c60.96,69.774) 60.96,70.739 ; P1.3@60.277,70.456 cw(c60.96,69.774) 60.96,70.739 ; P1.3@60.277,70.456 cw(c60.96,69.774) 60.96,70.739 ; P1.3@60.421,70.313 cw(c61.45,69.283) 61.45,70.739 ; P1.3@60.421,70.313 cw(c61.45,69.283) 61.45,70.739 ; P1.3@60.421,70.313 cw(c61.45,69.283) 61.45,70.739 ; P1.3@60.421,71.013 ccw(c61.083,71.674) 61.083,70.739 ; P1.3@60.421,71.013 ccw(c61.083,71.674) 61.083,70.739 ; P1.3@60.421,71.013 ccw(c61.083,71.674) 61.083,70.739 ; P1.3@60.565,70.169 cw(c61.941,68.793) 61.941,70.739 ; P1.3@60.565,70.169 cw(c61.941,68.793) 61.941,70.739 ; P1.3@60.565,70.169 cw(c61.941,68.793) 61.941,70.739 ; P1.3@60.565,71.157 ccw(c61.573,72.165) 61.573,70.739 ; P1.3@60.565,71.157 ccw(c61.573,72.165) 61.573,70.739 ; P1.3@60.565,71.157 ccw(c61.573,72.165) 61.573,70.739
TX_DEBUG: P2.4 U3.39 | length 6.8
  Top Layer w0.203: P2.4@66.096,77.013 66.7,77.013 ; U3.39@70.098,79.471 69.159,79.471 66.7,77.013 ; P2.4@66.463,76.856 cw(c66.7,76.754) 66.7,77.013 ; P2.4@66.463,76.856 cw(c66.7,76.754) 66.7,77.013 ; P2.4@66.463,76.856 cw(c66.7,76.754) 66.7,77.013 ; P2.4@66.463,77.17 ccw(c66.7,77.271) 66.7,77.013 ; P2.4@66.463,77.17 ccw(c66.7,77.271) 66.7,77.013 ; P2.4@66.463,77.17 ccw(c66.7,77.271) 66.7,77.013
TX_LEIDA: LeiDa.3 R30.1 U3.1 | length 78.6
  Top Layer w0.203: v1(69.748,76.064) 69.748,76.606 ; U3.1@70.797,78.372 70.797,77.655 69.748,76.606 ; v1(87.147,97.231) 87.706,97.231 ; LeiDa.3@88.834,99.821 88.834,98.359 87.706,97.231 ; 69.748,76.606 ccw(c70.217,76.606) 69.911,76.252 cw(c70.217,76.606) 69.748,76.606 ; 69.748,76.606 cw(c69.28,76.606) 69.586,76.252 ccw(c69.28,76.606) 69.748,76.606 ; v1@87.332,97.065 cw(c87.706,96.727) 87.706,97.231 ; v1@87.332,97.065 cw(c87.706,96.727) 87.706,97.231 ; v1@87.332,97.065 cw(c87.706,96.727) 87.706,97.231 ; v1@87.332,97.398 ccw(c87.706,97.735) 87.706,97.231 ; v1@87.332,97.398 ccw(c87.706,97.735) 87.706,97.231 ; v1@87.332,97.398 ccw(c87.706,97.735) 87.706,97.231 ; LeiDa.3@88.693,99.181 cw(c88.355,98.843) 88.834,98.843 ; LeiDa.3@88.693,99.181 cw(c88.355,98.843) 88.834,98.843 ; LeiDa.3@88.693,99.181 cw(c88.355,98.843) 88.834,98.843 ; 88.834,98.843 cw(c89.313,98.843) LeiDa.3@88.974,99.181 ; 88.834,98.843 cw(c89.313,98.843) LeiDa.3@88.974,99.181 ; 88.834,98.843 cw(c89.313,98.843) LeiDa.3@88.974,99.181
  Bottom Layer w0.203: v1(69.748,76.064) 70.504,76.064 70.738,75.829 70.771,75.829 71.137,75.463 71.764,75.463 72.145,75.082 74.924,75.082 75.152,74.854 82.423,74.854 84.834,77.265 ; R30.1@84.15,92.718 84.15,94.317 85.899,96.066 ; 84.633,77.064 84.834,77.265 ; 86.113,96.281 85.899,96.066 ; 70.348,76.064 ccw(c70.348,75.464) 69.924,75.888 cw(c70.348,75.464) 70.348,76.064 ; 70.348,76.064 cw(c70.348,76.663) 69.924,76.239 ccw(c70.348,76.663) 70.348,76.064 ; R30.1@83.893,92.975 ccw(c83.273,93.595) 84.15,93.595 ; R30.1@83.893,92.975 ccw(c83.273,93.595) 84.15,93.595 ; R30.1@83.893,92.975 ccw(c83.273,93.595) 84.15,93.595 ; 84.15,93.595 ccw(c85.028,93.595) R30.1@84.407,92.975 ; 84.15,93.595 ccw(c85.028,93.595) R30.1@84.407,92.975 ; 84.15,93.595 ccw(c85.028,93.595) R30.1@84.407,92.975 ; 84.834,77.265 88.189,80.62 91.516,80.62 95.854,84.957 95.854,88.887 95.39,89.352 93.56,89.352 87.147,95.765 v1(87.147,97.231) 85.983,96.066 85.899,96.066 ; 86.723,96.807 cw(c87.147,96.383) v1@87.147,96.983 ; 86.723,96.807 ccw(c86.299,97.231) v1@86.899,97.231 ; 86.723,96.807 ccw(c86.299,97.231) v1@86.899,97.231 ; 86.723,96.807 cw(c87.147,96.383) v1@87.147,96.983 ; 86.723,96.807 ccw(c86.299,97.231) v1@86.899,97.231 ; 86.723,96.807 cw(c87.147,96.383) v1@87.147,96.983 ; v1@86.972,97.056 cw(c86.548,96.632) 87.147,96.632 ; v1@86.972,97.056 cw(c86.548,96.632) 87.147,96.632 ; v1@86.972,97.056 cw(c86.548,96.632) 87.147,96.632 ; 87.147,96.632 cw(c87.747,96.632) v1@87.323,97.056 ; 87.147,96.632 cw(c87.747,96.632) v1@87.323,97.056 ; 87.147,96.632 cw(c87.747,96.632) v1@87.323,97.056
USB_DEC: C27.2 R35.2 R36.1 U3.6 | length 29.4
  Top Layer w0.203: R36.1@67.953,73.889 67.928,73.863 R35.2@67.928,72.111 68.047,72.23 C27.2@69.723,72.23 71.001,72.23 71.349,71.882 73.558,71.882 73.711,72.034 73.711,75.616 72.797,76.53 U3.6@72.797,78.372 ; 67.928,73.013 ccw(c68.805,73.013) R35.2@68.185,72.393 ; 67.928,73.013 cw(c67.05,73.013) 67.671,72.393 ccw(c67.05,73.013) 67.928,73.013 ; 67.928,73.013 ccw(c68.805,73.013) R35.2@68.185,72.393 ; R35.2@68.185,72.393 ccw(c68.578,72.786) 68.578,72.23 cw(c68.578,72.786) R35.2@68.185,72.393 ; 68.821,72.23 ccw(c68.821,73.107) 69.441,72.487 cw(c68.821,73.107) 68.821,72.23 ; 68.821,72.23 cw(c68.821,71.352) 69.441,71.973 ccw(c68.821,71.352) 68.821,72.23 ; 70.625,72.23 ccw(c70.625,71.352) 70.005,71.973 cw(c70.625,71.352) 70.625,72.23 ; 70.625,72.23 cw(c70.625,73.107) 70.005,72.487 ccw(c70.625,73.107) 70.625,72.23 ; R36.1@67.696,73.607 cw(c67.137,73.047) 67.928,73.047 ccw(c67.137,73.047) R36.1@67.696,73.607 ; 67.928,72.925 cw(c68.892,72.925) 68.21,73.607 ccw(c68.892,72.925) 67.928,72.925 ; R35.2@68.041,72.022 cw(c68.541,71.522) 68.541,72.23 ccw(c68.541,71.522) R35.2@68.041,72.022 ; R35.2@68.185,71.879 cw(c69.032,71.031) 69.032,72.23 ccw(c69.032,71.031) R35.2@68.185,71.879
V_BAT_CON: R10.2 U3.15 | length 11.5
  Top Layer w0.203: U3.15@75.096,80.671 77.012,80.671 78.308,79.375 78.308,77.876 78.867,77.318 78.867,74.498 R10.2@79.35,74.016 ; 79.104,74.262 cw(c78.426,73.583) 79.385,73.583 ccw(c78.426,73.583) 79.104,74.262 ; R10.2@79.329,74.036 ccw(c79.545,74.252) 79.545,73.947 cw(c79.545,74.252) R10.2@79.329,74.036
VBUS_BAT: C2.2 C20.1 C21.2 D7.2 M1.5 M2.5 Q4.2 Q6.2 R2.1 R29.1 U2.1 U4.6 U6.6 | length 133.5
  Top Layer w0.203: C21.2@69.742,95.207 C21.2@70.053,95.207
  Top Layer w0.381: 84.379,82.983 cw(c85.347,82.983) Q4.2@84.662,83.668 ; Q4.2@84.694,84.215 cw(c85.668,84.215) 84.98,84.903 ; 85.161,85.084 ccw(c83.969,86.276) R29.1@85.654,86.276 ; 85.811,85.735 ccw(c85.27,86.276) R29.1@86.035,86.276 ; R29.1@85.954,86.276 85.954,85.877 84.585,84.509 Q4.2@84.585,83.98 84.379,83.774 84.379,80.721 84.684,80.416 88.722,80.416 89.154,79.985 89.154,77.513 v1@88.933,77.292 ; 89.154,77.984 ccw(c89.973,77.984) v1@89.394,77.405
  Top Layer w0.508: C2.2@85.892,76.867 C2.2@86.03,77.005
  Top Layer w0.6: 73.515,99.601 cw(c74.606,98.51) M2.5@75.147,99.955 ; M2.5@74.869,99.346 ccw(c75.29,99.346) 74.993,99.048 ; 75.398,98.642 cw(c74.641,97.884) C20.1@75.709,97.802 ; v1@82.474,99.721 cw(c82.474,98.129) 83.6,99.255 ; v1@82.489,99.724 cw(c82.744,98.924) 83.337,99.517 ; 83.033,99.822 83.845,99.009 ; v1@83.133,100.305 ccw(c84.542,100.305) 83.546,99.309
  Top Layer w0.635: U2.1@84.256,77.113 84.339,77.03 R2.1@87.935,77.03 ; R2.1@88.03,77.16 ccw(c88.393,77.833) v1@88.933,77.292 ; R2.1@88.113,77.03 R2.1@87.935,77.03 ; 88.57,77.03 ccw(c88.57,78.003) v1@89.258,77.315 ; 88.632,76.991 cw(c89.281,76.342) v1@89.281,77.26 ; v1@89.256,77.312 cw(c88.671,77.776) 88.671,77.03 ; v1@90.018,77.292 v1(89.281,77.292) v1@88.933,77.292 ; R2.1@87.935,77.03 88.671,77.03 ; 88.671,77.03 v1@88.933,77.292
  Top Layer w1: C21.2@70.053,95.207 70.053,96.393
  Top Layer w1.5: D7.2@105.776,89.804 cw(c104.54,89.849) 104.54,88.613 ; D7.2@105.779,89.813 cw(c103.401,91.57) Q6.2@103.4,88.613 104.54,88.613 ; D7.2@105.791,89.864 104.54,88.613
  Bottom Layer w0.8: v1@89.256,77.318 v1(89.281,77.292) v1(90.068,77.292) 90.195,77.292 90.272,77.216 90.272,77.114 90.526,76.86 ; v1@90.019,77.283 ccw(c90.526,77.375) 90.526,76.86 ; v1@90.033,77.257 ccw(c90.99,78.214) 90.99,76.86 ; v1(105.08,91.999) 103.701,90.62 103.701,87.038 96.266,79.604 96.266,78.774 94.352,76.86 90.526,76.86
  Bottom Layer w1.5: 61.541,101.705 cw(c62.391,100.855) 62.391,102.057 ; 61.566,102.257 ccw(c62.048,102.739) 62.048,102.057 ; 62.078,102.057 63.336,102.057 65.216,100.178 82.398,100.178 82.753,100.533 ; 82.191,100.054 cw(c82.489,99.756) 82.489,100.178 84.712,102.401 93.003,102.401 94.209,103.607 103.683,103.607 105.74,101.549 105.74,92.862 ; 82.458,100.178 cw(c82.458,99.756) 82.757,100.054 ; 105.363,92.656 ccw(c104.451,93.567) 105.74,93.567 ; 105.363,93.221 cw(c104.451,92.31) 105.74,92.31 ; 105.74,92.923 cw(c106.162,92.923) 105.864,93.221 ; 105.74,92.954 ccw(c106.162,92.954) 105.864,92.656 ; 105.363,91.716 ccw(c104.451,92.627) 105.74,92.627 cw(c104.451,92.627) 105.363,91.716
  other v1: 106.172,91.999 105.08,92.939 106.147,92.939 82.474,99.771 69.393,99.974 70.333,99.974 71.272,99.974 72.136,99.974 73,99.974 73.863,99.974 83.083,100.305 81.788,100.406 61.824,101.422 61.239,101.93 61.849,102.54
VCC_USB: C1.2 D1.2 D7.1 Q6.1 R3.2 R35.1 R37.2 USB1.A9 USB1.B9 | length 96.3
  Top Layer w0.254: v1(64.973,71.958) 66.235,71.958 R35.1@66.388,72.111 ; v1@65.264,71.958 ccw(c65.264,73.209) R35.1@66.149,72.325 ; 65.877,71.958 ccw(c65.877,72.596) R35.1@66.328,72.145 ; 65.879,71.958 cw(c65.879,71.577) R35.1@66.149,71.847 ; 65.512,71.958 ccw(c65.512,71.42) 65.131,71.801 cw(c65.512,71.42) 65.512,71.958 ; 65.512,71.958 cw(c65.512,72.497) 65.131,72.116 ccw(c65.512,72.497) 65.512,71.958
  Top Layer w0.381: Q6.1@101.5,88.613 101.5,88.212 103.234,86.479 R37.2@103.234,85.623 103.359,85.749 D7.1@105.816,85.749 ; Q6.1@101.61,88.378 ccw(c102.274,88.378) 101.804,87.908 ; R37.2@103.04,85.842 ccw(c102.571,86.311) 103.234,86.311 ccw(c103.896,86.311) R37.2@103.428,85.842 ; R37.2@103.428,85.454 cw(c104.139,84.743) 104.139,85.749 ; D7.1@105.41,85.343 ccw(c104.429,84.362) 104.429,85.749 ccw(c104.429,87.136) D7.1@105.41,86.155
  Top Layer w0.7: 99.815,75.08 USB1.B9@101.164,73.386 ; 99.823,75.183 102.211,76.885 USB1.A9@103.559,75.191
  Top Layer w1: R3.2@96.224,80.277 cw(c95.532,79.339) 96.698,79.339 ; R3.2@96.444,80.467 ccw(c99.347,80.467) D1.2@97.294,78.415 ; 96.698,79.46 ccw(c98.108,79.46) D1.2@97.111,78.463 ; R3.2@96.698,80.961 96.698,79.426 ccw(c98.026,79.426) D1.2@97.109,78.465 ; D1.2@96.735,78.292 96.777,78.334 D1.2@97.167,78.334 ; 99.478,77.948 100.838,76.251 ; 100.037,78.38 101.397,76.683
  Top Layer w1.2: D1.2@97.167,78.292 98.623,78.292 100.473,78.292 100.508,78.257 100.736,78.486 C1.2@100.982,78.486 ; 100.27,78.02 cw(c101.171,77.119) C1.2@101.443,78.363
  Top Layer w1.5: 100.889,78.453 100.889,79.375 101.478,79.964 ; 100.889,78.812 ccw(c101.995,78.812) C1.2@101.213,78.03 ; C1.2@101.157,78.11 cw(c102.633,78.809) 101.478,79.964 ; D7.1@105.816,85.749 105.816,81.585 104.242,80.01 101.641,80.01 101.595,79.964 101.478,79.964
  Bottom Layer w0.254: v1@64.973,71.735 cw(c64.973,71.197) 65.354,71.578 cw(c65.735,71.958) v1@65.196,71.958 ; v1(64.973,71.958) 65.383,71.548 73.419,71.548 73.667,71.796 81.62,71.796 82.499,70.917 82.499,69.545 82.855,69.19 84.887,69.19 85.471,69.774 85.471,70.841 90.399,75.768 95.631,75.768 v1(98.196,78.334) ; v1@65.131,71.801 cw(c65.512,71.42) 65.512,71.958 cw(c65.512,72.497) v1@65.131,72.116 ; v1@97.973,78.334 cw(c97.435,78.334) 97.816,77.953 cw(c98.196,77.572) v1@98.196,78.111
XC1: C16.2 U3.29 Y1.1 | length 32.4
  Top Layer w0.203: C16.2@63.398,86.2 63.574,86.376 65.699,86.376 65.699,85.203 66.091,84.811 70.688,84.811 71.197,84.302 U3.29@71.197,83.371 ; C16.2@63.537,86.086 cw(c64.235,85.388) 64.235,86.376 ; C16.2@63.537,86.086 cw(c64.235,85.388) 64.235,86.376 ; C16.2@63.537,86.086 cw(c64.235,85.388) 64.235,86.376 ; C16.2@63.68,85.943 cw(c64.726,84.897) 64.726,86.376 ; C16.2@63.68,85.943 cw(c64.726,84.897) 64.726,86.376 ; C16.2@63.68,85.943 cw(c64.726,84.897) 64.726,86.376 ; C16.2@63.68,86.457 ccw(c63.876,86.652) C16.2@63.876,86.376 ; C16.2@63.68,86.457 ccw(c63.876,86.652) C16.2@63.876,86.376 ; C16.2@63.68,86.457 ccw(c63.876,86.652) C16.2@63.876,86.376 ; 64.192,86.376 cw(c64.192,85.172) Y1.1@65.043,86.023 ; 64.192,86.376 ccw(c64.192,87.579) Y1.1@65.043,86.728 ; 64.192,86.376 ccw(c64.192,87.579) Y1.1@65.043,86.728 ; 64.192,86.376 cw(c64.192,85.172) Y1.1@65.043,86.023 ; 64.192,86.376 ccw(c64.192,87.579) Y1.1@65.043,86.728 ; 64.192,86.376 cw(c64.192,85.172) Y1.1@65.043,86.023 ; 64.683,86.376 cw(c64.683,85.663) Y1.1@65.187,86.167 ; 64.683,86.376 ccw(c64.683,87.088) Y1.1@65.187,86.584 ; 64.683,86.376 ccw(c64.683,87.088) Y1.1@65.187,86.584 ; 64.683,86.376 cw(c64.683,85.663) Y1.1@65.187,86.167 ; 64.683,86.376 ccw(c64.683,87.088) Y1.1@65.187,86.584 ; 64.683,86.376 cw(c64.683,85.663) Y1.1@65.187,86.167 ; Y1.1@65.303,85.972 cw(c64.744,85.198) 65.699,85.198 ; Y1.1@65.303,85.972 cw(c64.744,85.198) 65.699,85.198 ; Y1.1@65.303,85.972 cw(c64.744,85.198) 65.699,85.198 ; Y1.1@65.422,86.136 cw(c65.032,85.596) 65.699,85.596 ; Y1.1@65.422,86.136 cw(c65.032,85.596) 65.699,85.596 ; Y1.1@65.422,86.136 cw(c65.032,85.596) 65.699,85.596 ; 65.699,85.422 cw(c66.549,85.422) Y1.1@65.948,86.023 ; 65.699,85.422 cw(c66.549,85.422) Y1.1@65.948,86.023 ; 65.699,85.422 cw(c66.549,85.422) Y1.1@65.948,86.023
XC2: C17.2 U3.28 Y1.3 | length 27.4
  Top Layer w0.203: Y1.3@67.899,88.076 68.014,87.96 70.688,87.96 ; U3.28@71.597,83.371 71.597,84.653 71.145,85.104 71.145,87.503 70.688,87.96 ; Y1.3@68.004,88.284 ccw(c68.787,89.067) 68.787,87.96 ; Y1.3@68.004,88.284 ccw(c68.787,89.067) 68.787,87.96 ; Y1.3@68.004,88.284 ccw(c68.787,89.067) 68.787,87.96 ; Y1.3@68.148,87.723 cw(c68.72,87.151) 68.72,87.96 ; Y1.3@68.148,87.723 cw(c68.72,87.151) 68.72,87.96 ; Y1.3@68.148,87.723 cw(c68.72,87.151) 68.72,87.96 ; Y1.3@68.148,88.428 ccw(c69.278,89.558) C17.2@69.278,87.96 ; Y1.3@68.148,88.428 ccw(c69.278,89.558) C17.2@69.278,87.96 ; Y1.3@68.148,88.428 ccw(c69.278,89.558) C17.2@69.278,87.96 ; 68.493,87.96 cw(c68.493,86.763) C17.2@69.339,87.61 ; 68.493,87.96 cw(c68.493,86.763) C17.2@69.339,87.61 ; 68.493,87.96 cw(c68.493,86.763) C17.2@69.339,87.61 ; 68.945,87.96 ccw(c68.945,88.518) C17.2@69.339,88.124 ; 68.945,87.96 ccw(c68.945,88.518) C17.2@69.339,88.124 ; 68.945,87.96 ccw(c68.945,88.518) C17.2@69.339,88.124 ; 68.984,87.96 cw(c68.984,87.254) C17.2@69.483,87.753 ; 68.984,87.96 cw(c68.984,87.254) C17.2@69.483,87.753 ; 68.984,87.96 cw(c68.984,87.254) C17.2@69.483,87.753 ; C17.2@69.764,87.758 cw(c70.225,87.334) 70.225,87.96 ; C17.2@69.764,87.758 cw(c70.225,87.334) 70.225,87.96 ; C17.2@69.764,87.758 cw(c70.225,87.334) 70.225,87.96 ; C17.2@69.903,88.124 ccw(c70.298,88.518) 70.298,87.96 ; C17.2@69.903,88.124 ccw(c70.298,88.518) 70.298,87.96 ; C17.2@69.903,88.124 ccw(c70.298,88.518) 70.298,87.96 ; C17.2@69.914,87.62 cw(c70.688,86.908) 70.688,87.96 ; C17.2@69.914,87.62 cw(c70.688,86.908) 70.688,87.96 ; C17.2@69.914,87.62 cw(c70.688,86.908) 70.688,87.96
pads on no net: M1.6 M1.7 M2.6 M2.7 U1.6 U2.4 U3.33 U3.35 U3.36 U3.37

## Polygon pours and split planes (outlines as drawn)
GND on Top Layer "Bottom Layer-No Net" (solid, remove dead copper): 55.093,104.72 55.099,104.713 55.099,64.53 55.099,64.458 57.074,62.484 58.547,61.011 86.462,61.011 95.072,61.011 101.727,67.666 99.289,70.104 99.289,71.145 99.339,71.145 100.254,72.06 101.879,73.685 102.692,73.685 102.921,73.685 103.861,74.625 104.546,75.311 105.004,75.311 105.486,75.311 106.375,76.2 109.23,73.345 109.23,73.275 109.28,73.275 109.468,73.464 109.468,104.72 94.183,104.72 92.532,104.72 92.532,98.933 92.481,98.882 92.38,98.781 60.274,98.781 60.274,104.72
GND on Bottom Layer "Bottom Layer-No Net" (solid, remove dead copper, pour order 1001): 55.087,104.715 55.094,104.708 55.094,64.525 55.1,64.525 57.474,62.378 58.907,61.083 94.298,61.083 101.32,61.083 114.718,73.198 114.802,73.275 114.802,75.053 114.802,76.932 109.409,81.809 109.397,81.82 109.397,104.715